# Allegro board 328+328.brd
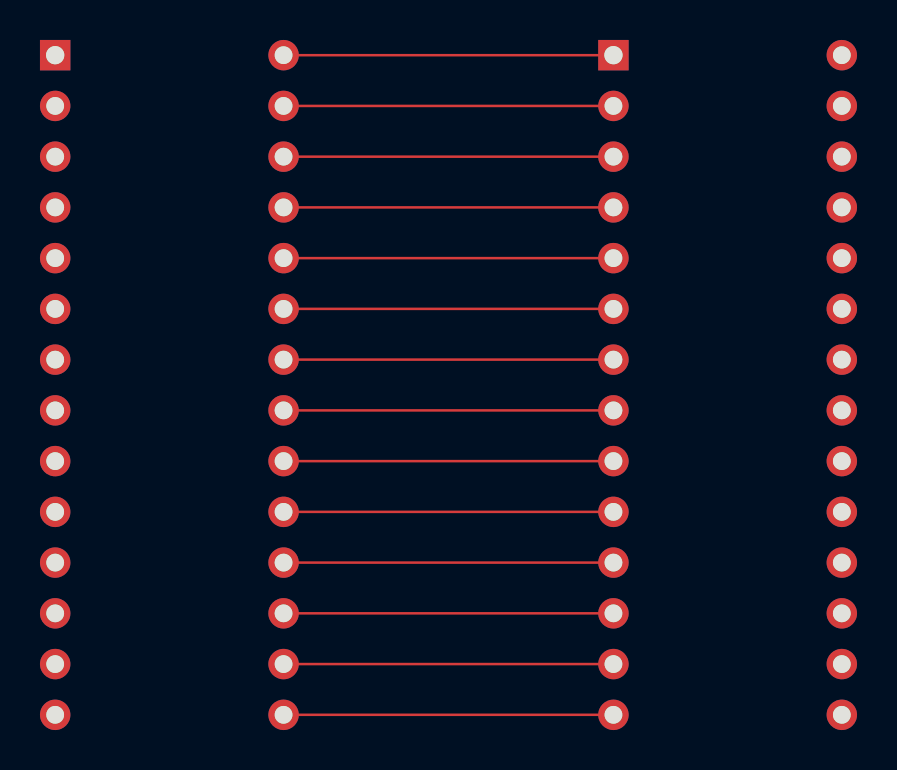
[diagram p0: board, top side]
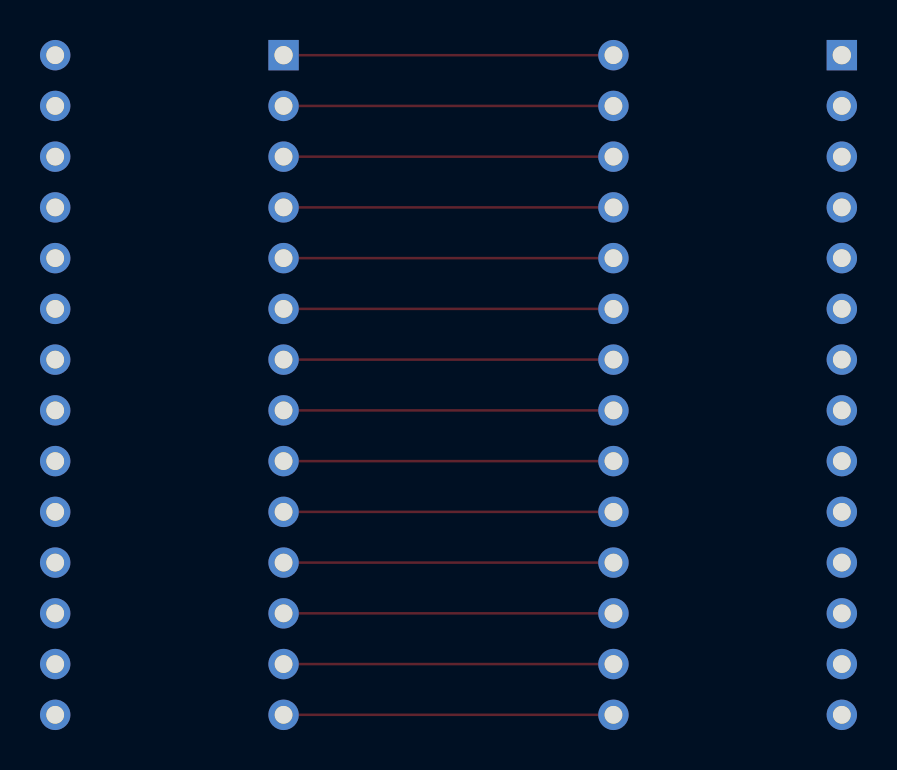
[diagram p1: board, bottom side, seen from below]

No outline. copper layers: TOP, BOTTOM. Coordinates in mm from the lowest, leftmost part position.

## Placement (name value [footprint] x y rotation side)
J1  DIPSOC-14x2  [MY_ATMEGA328]  0 0 0 top
J2  DIPSOC-14x2  [MY_ATMEGA328]  27.94 0 0 top

## Library data of the parts
J1 J2 = DIPSOC-14x2

## Footprints (pads in the part's own frame, mm; a bottom-side part is the same pattern mirrored in y, then rotated)
MY_ATMEGA328
  rect 1.524x1.524 hole 0.914: 1(-6.35,9.525)
  round 1.524 hole 0.889: 2(-6.35,6.985) 3(-6.35,4.445) 4(-6.35,1.905) 5(-6.35,-0.635) 6(-6.35,-3.175) 7(-6.35,-5.715) 8(-6.35,-8.255) 9(-6.35,-10.795) 10(-6.35,-13.335) 11(-6.35,-15.875) 12(-6.35,-18.415) 13(-6.35,-20.955) 14(-6.35,-23.495) 15(5.08,-23.495) 16(5.08,-20.955) 17(5.08,-18.415) 18(5.08,-15.875) 19(5.08,-13.335) 20(5.08,-10.795) 21(5.08,-8.255) 22(5.08,-5.715) 23(5.08,-3.175) 24(5.08,-0.635) 25(5.08,1.905) 26(5.08,4.445) 27(5.08,6.985) 28(5.08,9.525)

## Nets
N03422: J1.28 J2.1
N03424: J1.27 J2.2
N03426: J1.26 J2.3
N03432: J1.25 J2.4
N03438: J1.24 J2.5
N03444: J1.23 J2.6
N03450: J1.22 J2.7
N03456: J1.21 J2.8
N03462: J1.20 J2.9
N03468: J1.19 J2.10
N03474: J1.18 J2.11
N03480: J1.17 J2.12
N03486: J1.16 J2.13
N03492: J1.15 J2.14

Pads without a net: J1 1 2 3 4 5 6 7 8 9 10 11 12 13 14; J2 15 16 17 18 19 20 21 22 23 24 25 26 27 28

## Routing (per net, layer and track width the routed paths; a pad name or vN(x,y) marks a point on that pad's centre or on a via; arc(x,y) is an arc through that point)
N03422: length 16.5
  TOP w0.127: 21.59,9.52 5.08,9.52
N03424: length 16.5
  TOP w0.127: J1.27 J2.2
N03426: length 16.5
  TOP w0.127: J2.3 J1.26
N03432: length 16.5
  TOP w0.127: J1.25 J2.4
N03438: length 16.5
  TOP w0.127: J2.5 J1.24
N03444: length 16.5
  TOP w0.127: J1.23 J2.6
N03450: length 16.5
  TOP w0.127: J2.7 J1.22
N03456: length 16.5
  TOP w0.127: J2.8 J1.21
N03462: length 16.5
  TOP w0.127: J1.20 J2.9
N03468: length 16.5
  TOP w0.127: J2.10 J1.19
N03474: length 16.5
  TOP w0.127: J2.11 J1.18
N03480: length 16.5
  TOP w0.127: 5.08,-18.42 21.59,-18.42
N03486: length 16.5
  TOP w0.127: J2.13 J1.16
N03492: length 16.5
  TOP w0.127: J1.15 J2.14
